# Altium PCB PowerModule.PcbDoc (part 3 of 3)
Units mm, origin at the board's own origin, x right, y up, seen from the top; angles counter-clockwise.
Board outline 200 x 99.95 mm, 2 copper layers (Top Layer 1, Bottom Layer 1); 228 components, 131 nets, 701 pads, 207 vias.
Unrouted connection lines stored in the file: 344.
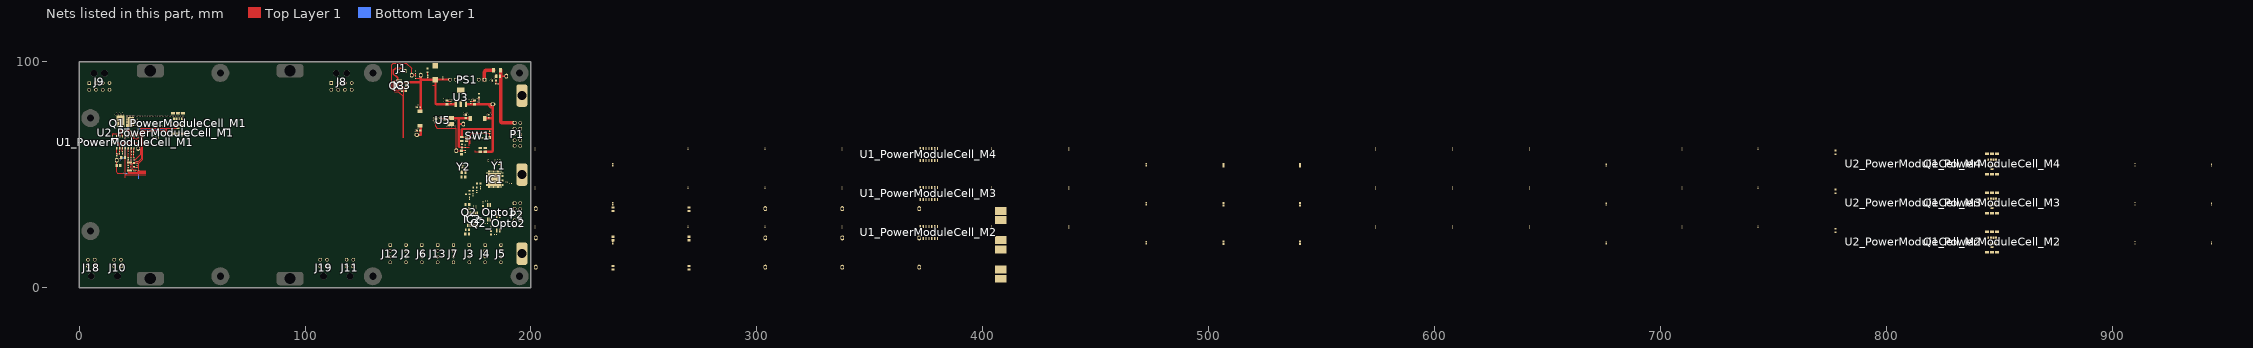
[diagram p2: the nets of this part, all layers, seen from the top]

## Part data (continued)
R1 R17_PowerModuleCell_M1 R17_PowerModuleCell_M2 R17_PowerModuleCell_M3 R17_PowerModuleCell_M4: library part CMP-2002-05875-2, "RES SMD 10K OHM 0.1% 1/16W 0402", Manufacturer=Panasonic, Manufacturer Part Number=ERA-2AEB103X, Package=ERA2A, Power Rating=0.063W, Resistance=10kΩ, Temperature="-55°C to +155°C", Temperature Coefficient=25ppm/°C, Temperature Range High=+155°C, Temperature Range Low=-55°C, Tolerance=0.1%, Voltage Rating=50V, Automotive=Yes, Automotive Grade="Grade 0", Category=Res, ComponentLink2Description=Datasheet, ComponentLink2URL=https://industrial.panasonic.com/cdbs/www-data/pdf/RDM0000/AOA0000C307.pdf, Composition="Metal Film", Device Class L1="Passive Components", Device Class L2=Resistors, Device Class L3="Chip SMD Resistors", Digikey Description="RES SMD 10K OHM 0.1% 1/16W 0402", Footprint Url=https://industrial.panasonic.com/cdbs/www-data/pdf/RDM0000/DMM0000COL17.pdf, Height=0.4mm, Lead Free=Yes, Mouser Description="Thin Film Resistors - SMD 0402 1/16W 10Kohms", Octopart=https://octopart.com/era-2aeb103x-panasonic-9251377, RoHS=TRUE, Series=ERA
R2: library part CMP-2002-00758-4, "RES SMD 2K OHM 1% 1/10W 0402", Case Code (Imperial)=0402, Case Code (Metric)=1005, Max Operating Temperature=155°C, Max Power Dissipation=100mW, Min Operating Temperature=-55°C, Package Quantity=10000, Resistance=2kR, Resistance Tolerance=1%, Resistor Type="Thick Film", Temperature Coefficient=100ppm/°C, Voltage Rating=50V, Case/Package=0402, Construction=Rectangular, Contact Plating=Tin, Depth=0.5mm, Features="Automotive AEC-Q200", Height=0.35mm, Lead Free="Lead Free", Length=1mm, Military Standard=Not, Mount="Surface Mount", Number of Terminations=2, Packaging="Tape and Reel", Power Rating=100mW, Radiation Hardening=No, REACH SVHC="No SVHC", RoHS Compliant=Yes, Series=ERJ, Technology="THICK FILM", Termination=SMD/SMT, Tolerance=1%, Voltage Rating (DC)=50V, Width=0.02inch, Working Voltage=50V
R3 R4 R5 R18_PowerModuleCell_M1 R18_PowerModuleCell_M2 R18_PowerModuleCell_M3 R18_PowerModuleCell_M4: library part CMP-1011-00360-3, "RES SMD 47 OHM 1% 1/10W 0402", Case Code (Imperial)=0402, Case Code (Metric)=1005, Max Operating Temperature=155°C, Max Power Dissipation=100mW, Min Operating Temperature=-55°C, Package Quantity=1, Resistance=47R, Resistance Tolerance=1%, Resistor Type="Thick Film", Temperature Coefficient=100ppm/°C, Voltage Rating=50V, Case/Package=0402, Construction=Rectangular, Contact Plating=Tin, Depth=0.5mm, Features="Automotive AEC-Q200", Height=0.35mm, Lead Free="Lead Free", Length=1mm, Military Standard=Not, Mount="Surface Mount", Number of Pins=2, Number of Terminations=2, Packaging="Tape and Reel", Power Rating=100mW, REACH SVHC="No SVHC", RoHS Compliant=Yes, Series=ERJ, Technology="THICK FILM", Termination=SMD/SMT, Tolerance=1%, Voltage Rating (DC)=50V, Weight=2.8E-05oz, Width=0.02inch
R6: library part CMP-2002-05845-1, Manufacturer=Panasonic, Part Number=ERA-2AED182X
R7: library part CMP-2002-00976-1, Manufacturer=Panasonic, Part Number=ERJ-2RKF5113X
R8 R9 R10 R11: library part CMP-2002-01127-1, Manufacturer=Panasonic, Part Number=ERJ2RKF1800X
R12 R13 R15 R16 R20_PowerModuleCell_M1 R20_PowerModuleCell_M2 R20_PowerModuleCell_M3 R20_PowerModuleCell_M4 R33_Opto1 R33_Opto2: library part CMP-2002-01154-4, "Chip Resistor, 4.7 KOhm, +/- 1%, 0.1 W, -55 to 155 degC, 0402 (1005 Metric), RoHS, Tape and Reel", Case Code (Imperial)=0402, Case Code (Metric)=1005, Max Operating Temperature="155 degC", Min Operating Temperature="-55 degC", Package Quantity=1, PartNumber=ERJ-2RKF4701X, Power Rating="100 mW", Resistance="4.7 KOhm", Tolerance=1%, Voltage Rating="50 V", Case\/Package=0402, ComponentLink1Description="Manufacturer URL", ComponentLink1URL=http://www.panasonic.com/, ComponentLink2Description=Datasheet, ComponentLink2URL=http://industrial.panasonic.com/cdbs/www-data/pdf/RDA0000/AOA0000C86.pdf, DatasheetVersion=04/2015, Height="0.35 mm", Length="1 mm", Mount="Surface Mount", Mounting Technology="Surface Mount", PackageDescription="2-Pin Surface Mount Device, Body 1 x 0.5 mm", PackageReference=0402, Packaging="Cut Tape", Pins=2, Radiation Hardening=No, REACH SVHC=Yes, RoHSCompliant=true, Width="0.5 mm"
R14: library part CMP-2002-00433-1, Manufacturer=Panasonic, Part Number=ERJ-2GEJ103X
R19_PowerModuleCell_M1 R19_PowerModuleCell_M2 R19_PowerModuleCell_M3 R19_PowerModuleCell_M4 R21_PowerModuleCell_M1 R21_PowerModuleCell_M2 R21_PowerModuleCell_M3 R21_PowerModuleCell_M4 R24_PowerModuleCell_M1 R24_PowerModuleCell_M2 R24_PowerModuleCell_M3 R24_PowerModuleCell_M4 R27_PowerModuleCell_M1 R27_PowerModuleCell_M2 R27_PowerModuleCell_M3 R27_PowerModuleCell_M4 R28_PowerModuleCell_M1 R28_PowerModuleCell_M2 R28_PowerModuleCell_M3 R28_PowerModuleCell_M4 R29_PowerModuleCell_M1 R29_PowerModuleCell_M2 R29_PowerModuleCell_M3 R29_PowerModuleCell_M4 R32_PowerModuleCell_M1 R32_PowerModuleCell_M2 R32_PowerModuleCell_M3 R32_PowerModuleCell_M4: library part CMP-1011-00510-4, "Chip Resistor, 1 KOhm, +/- 1%, 100 mW, -55 to 155 degC, 0402 (1005 Metric), RoHS, Tape and Reel", Case Code (Imperial)=0402, Case Code (Metric)=1005, Manufacturer="Basic Passives", Max Operating Temperature="155 degC", Min Operating Temperature="-55 degC", Package Quantity=10000, PartNumber=ERJ-2RKF1001X, Power Rating="100 mW", Resistance="1 KOhm", Tolerance=1%, Voltage Rating="50 V", Case\/Package=0402, ComponentLink1Description="Manufacturer URL", ComponentLink1URL=http://www.panasonic.com/, ComponentLink2Description=Datasheet, ComponentLink2URL=http://industrial.panasonic.com/cdbs/www-data/pdf/RDA0000/AOA0000C86.pdf, DatasheetVersion=04/2015, Height="0.35 mm", Length="1 mm", Mount="Surface Mount", Mounting Technology="Surface Mount", PackageDescription="2-Pin Surface Mount Device, Body 1 x 0.5 mm", PackageReference=0402, Packaging="Tape and Reel", Pins=2, Radiation Hardening=No, REACH SVHC=Yes, RoHSCompliant=true, Width="0.5 mm"
R22_PowerModuleCell_M1 R22_PowerModuleCell_M2 R22_PowerModuleCell_M3 R22_PowerModuleCell_M4: library part WSHP2818R0100FEA, "Resistor", Manufacturer_Name=Vishay, Mouser Part Number=71-WSHP2818R0100FEA, Arrow Part Number=WSHP2818R0100FEA, Arrow Price/Stock=https://www.arrow.com/en/products/wshp2818r0100fea/vishay?region=nac, Datasheet Link=http://www.vishay.com/docs/30347/wshp2818.pdf, Height=1mm, Manufacturer_Part_Number=WSHP2818R0100FEA, Mouser Price/Stock=https://www.mouser.co.uk/ProductDetail/Vishay-Dale/WSHP2818R0100FEA?qs=WY0B%252Bpw29jNppYK03UGNJA%3D%3D
R23_PowerModuleCell_M1 R23_PowerModuleCell_M2 R23_PowerModuleCell_M3 R23_PowerModuleCell_M4 R31_PowerModuleCell_M1 R31_PowerModuleCell_M2 R31_PowerModuleCell_M3 R31_PowerModuleCell_M4: library part CMP-1011-00449-3, "RES SMD 300 OHM 1% 1/10W 0402", Case Code (Imperial)=0402, Case Code (Metric)=1005, Max Operating Temperature=155°C, Max Power Dissipation=100mW, Min Operating Temperature=-55°C, Package Quantity=10000, Resistance=300R, Temperature Coefficient=100ppm/°C, Tolerance=1%, Voltage Rating=50V, Case/Package=0402, Composition="Thick Film", Contact Plating=Tin, Depth=0.5mm, Height=0.35mm, Lead Free="Lead Free", Length=1mm, Military Standard=Not, Mount="Surface Mount", Number of Terminations=2, Packaging="Tape and Reel", Power Rating=100mW, REACH SVHC="No SVHC", Termination=SMD/SMT, Voltage Rating (DC)=50V, Width=0.02inch
R25_PowerModuleCell_M1 R25_PowerModuleCell_M2 R25_PowerModuleCell_M3 R25_PowerModuleCell_M4 R26_PowerModuleCell_M1 R26_PowerModuleCell_M2 R26_PowerModuleCell_M3 R26_PowerModuleCell_M4 R30_PowerModuleCell_M1 R30_PowerModuleCell_M2 R30_PowerModuleCell_M3 R30_PowerModuleCell_M4: library part CMP-2002-00605-3, "Chip Resistor, 100 Ohm, +/- 1%, 100 mW, -55 to 155 degC, 0402 (1005 Metric), RoHS, Tape and Reel", Case Code (Imperial)=0402, Case Code (Metric)=1005, Manufacturer="Basic Passives", Max Operating Temperature="155 degC", Min Operating Temperature="-55 degC", Package Quantity=10000, PartNumber=ERJ-2RKF1000X, Power Rating="100 mW", Resistance="100 Ohm", Tolerance=1%, Voltage Rating="50 V", Case\/Package=0402, ComponentLink1Description="Manufacturer URL", ComponentLink1URL=http://www.panasonic.com/, ComponentLink2Description=Datasheet, ComponentLink2URL=http://industrial.panasonic.com/cdbs/www-data/pdf/RDA0000/AOA0000C86.pdf, DatasheetVersion=04/2015, Height="0.35 mm", Length="1 mm", Mount="Surface Mount", Mounting Technology="Surface Mount", PackageDescription="2-Pin Surface Mount Device, Body 1 x 0.5 mm", PackageReference=0402, Packaging="Tape and Reel", Pins=2, Radiation Hardening=No, REACH SVHC=Yes, RoHSCompliant=true, Width="0.5 mm"
R34_Opto1 R34_Opto2: library part CMP-2002-01170-2, Case Code (Imperial)=0402, Case Code (Metric)=1005, Max Operating Temperature=155°C, Max Power Dissipation=100mW, Min Operating Temperature=-55°C, Resistance=68Ω, Temperature Coefficient=100ppm/°C, Tolerance=1%, Voltage Rating=50V, Case/Package=0402, Composition="Thick Film", Contact Plating=Tin, Depth=500µm, Features="Automotive AEC-Q200", Height=350µm, Lead Free="Lead Free", Length=1mm, Lifecycle Status=Production, Military Standard=Not, Mount="Surface Mount", NexarPartId=55529255, Number of Pins=2, Number of Terminations=2, Packaging="Cut Tape", Power Rating=100mW, REACH SVHC="No SVHC", RoHS=Compliant, Schedule B="8533210045, 8533210045", Termination=SMD/SMT, Voltage Rating (DC)=50V, Weight=793.786648µg, Width=508µm
SW1: library part CMP-10040-000001-2, "SWITCH TACTILE SPST-NO 0.05A 16V", Case/Package=SMD/SMT, Color=Black, Current Rating=50mA, Max Operating Temperature=85°C, Min Operating Temperature=-40°C, Operating Force=160gf, Package Quantity=2900, Voltage Rating (DC)=16V, Actuator Type=Standard, Contact Plating=Silver, Depth=4.6mm, Illumination Type=Non-Illuminated, Lead Free="Lead Free", Length=3.2mm, Max Current Rating=50mA, Mechanical Life=150000Cycles, Mount="Surface Mount", Orientation=Straight, Packaging="Tape and Reel", RoHS Compliant=Yes, Switch Function=Off-Mom, Switch Travel=0.15mm, Termination=J-Bend, Throw Configuration=SPST
U1_PowerModuleCell_M1 U1_PowerModuleCell_M2 U1_PowerModuleCell_M3 U1_PowerModuleCell_M4: library part CMP-1310-00171-1, "Single Supply Quad Operational Amplifier, 3 to 32 V, 0 to 70 degC, 14-Pin SOIC, Pb-Free, Tape and Reel", Manufacturer="On Semiconductor", ComponentLink1Description="Manufacturer URL", ComponentLink1URL=http://www.onsemi.com/, ComponentLink2Description=Datasheet, ComponentLink2URL=http://www.onsemi.cn/pub_link/Collateral/LM324-D.PDF, ComponentLink3Description="Package Specification", ComponentLink3URL=http://www.onsemi.com/pub_link/Collateral/751A-03.PDF, DatasheetVersion="Rev. 25", Mounting Technology="Surface Mount", PackageDescription="14-Pin Small Outline Integrated Circuit, Body 8.65 x 3.9 mm, Pitch 1.27 mm", PackageReference=SOIC-14-751A-03, PackageVersion="Rev. K, 05/2011", Packing="Tape and Reel", PartNumber=LM324DR2G, RoHS=TRUE, VCC Max (V)=32, VCC Min (V)=3
U2_PowerModuleCell_M1 U2_PowerModuleCell_M2 U2_PowerModuleCell_M3 U2_PowerModuleCell_M4: library part CMP-04948-000037-1, "TEMP SENSOR"
U3: library part CMP-0136-00481-1, "500mA Fixed Output CMOS LDO, 3-Pin SOT-223, Extended Temperature, Tape and Reel", DatasheetVersion="revB, 2002", PackageDescription="3-Lead Plastic Small Outline Transistor (DB) [SOT-223]", PackageReference=SOT-223-DB3, PackageVersion="revBB, Aug-2009"
U5: library part CMP-0074-00531-5, "IC VREF SERIES 0.05% SOT23-5", Case/Package=SOT-23, Dropout Voltage=175mV, Max Input Voltage=6V, Max Operating Temperature=125°C, Max Output Current=20mA, Max Output Voltage=2.5V, Max Supply Voltage=2.2V, Min Operating Temperature=-40°C, Nominal Supply Current=60uA, Operating Supply Current=100uA, Package Quantity=1000, Temperature Coefficient=20ppm/°C, Tolerance=0.05%, Height=1.02mm, Lead Free="Lead Free", Length=2.92mm, Min Input Voltage=2.2V, Min Output Voltage=2.5V, Mount="Surface Mount", Number of Channels=1, Number of Pins=5, Output Current=20mA, Output Type=Fixed, Output Voltage=2.5V, Packaging="Tape and Reel", Quiescent Current=100uA, Radiation Hardening=No, REACH SVHC="No SVHC", Reference Type=Series, Reference Voltage=2.5V, Series=-, Supply Current=60uA, Termination=SMD/SMT, Width=1.6mm
Y1: library part CMP-25159-260295-1, "MEMS OSC TCXO 32.7680KHZ LVCMOS", Frequency=32.768kHz, Frequency Stability=5ppm, Max Operating Temperature=70°C, Min Operating Temperature=0°C, Height=0.024inch, Length=0.061inch, Mount="Surface Mount", Packaging="Cut Tape", RoHS Compliant=Yes, Series=SiT1552, Width=0.033inch
Y2: library part CMP-40224-000008-1, "XTAL OSC TCXO 16MHZ 3.3V SMD", Frequency=16MHz, Load Capacitance=15pF, Manufacturer=ECS, Max Supply Current=7mA, Max Supply Voltage=3.63V, Min Supply Voltage=2.97V, Package=TXO-2016, Temperature="-40°C to +85°C", Temperature Range High=+85°C, Temperature Range Low=-40°C, Automotive=No, Category=Crys, ComponentLink2Description=Datasheet, ComponentLink2URL=https://ecsxtal.com/store/pdf/ECS-TXO-2016.pdf, Device Class L1="Passive Components", Device Class L2="Crystals / Oscillators", Device Class L3=Oscillators, Digikey Description="XTAL OSC TCXO 16MHZ 3.3V SMD", Height=0.8mm, Lead Free=Yes, Manufacturer Part Number=ECS-TXO-2016-33-160-TR, Octopart=https://octopart.com/ecs-txo-2016-33-160-tr-ecs+international-102811109, RoHS=TRUE, Series=TXO-2016, Stability=2ppm

## Free pads (board coordinates)
  round 8 hole 3.15: Mech(5,25) Mech(5,75) Mech(62.5,5) Mech(62.5,95) Mech(130,5) Mech(130,95) Mech(195,5) Mech(195,95)
  rrect50% 12x6 hole 5 slot 10 at 0 deg: Mech(31.5,4) Mech(31.5,96) Mech(93.375,4) Mech(93.375,96)

## Via types
v1: diameter 0.61, hole 0.305, Top Layer 1 to Bottom Layer 1, tented both sides, 203 vias
v2: diameter 0.762, hole 0.381, Top Layer 1 to Bottom Layer 1, tented both sides, 2 vias
v3: diameter 0.762, hole 0.381, Top Layer 1 to Bottom Layer 1, 2 vias

## Nets (pads, with @x,y where several pads share a name; then routed paths per layer and width w, separated by ;. In a path a pad name is that pad's centre, name@x,y a point inside that pad or via, vN(x,y) a via of type N, cw(c..) or ccw(c..) an arc to the next point about the centre after c; other vN are vias at no path point)
2V5: C14.2 C15.2 C43.2 IC1.20 J22.1 U5.5 | length 27.3
  Top Layer 1 w0.254: J22.1@166.835,60.579 J22.1@167.005,60.579 ; C14.2@168.624,60.579 C14.2@169.232,60.559 cw(c169.411,60.559) 169.234,60.579 cw(c169.411,60.559) C14.2@169.411,60.738
  Top Layer 1 w0.45: C14.2@169.411,60.738 C15.2@170.96,60.738
  Top Layer 1 w0.5: C43.2@157.959,73.084 157.959,71.403 ccw(c158.881,71.407) 158.876,70.485 ; C43.2@158.023,73.116 C43.2@158.311,73.116 ; C43.2@158.517,73.091 159.954,73.091 U5.5@160.29,73.091 ; 158.877,70.485 166.497,70.485 cw(c166.497,69.977) 167.005,69.977 167.005,60.749 cw(c166.835,60.749) J22.1@166.835,60.579 ; J22.1@167.005,60.579 C14.2@168.624,60.579
3V3_F: C4.1 C6.2 C7.2 C42.1 IC1.21 J27.1 L2.1 U5.3 U5.4 Y1.3 | length 32.8
  Top Layer 1 w0.254: U5.3@162.391,74.985 U5.3@162.391,74.991 ; 168.021,72.517 ccw(c168.148,72.517) 168.148,72.39 ; C7.2@170.985,62.095 172.682,62.095 172.682,62.084
  Top Layer 1 w0.45: C6.2@169.564,62.095 C7.2@170.985,62.095
  Top Layer 1 w0.5: U5.4@159.831,74.991 U5.3@161.932,74.991 U5.3@162.391,74.991 ; U5.3@162.391,74.985 C42.1@164.557,74.985
  Top Layer 1 w0.762: 167.973,62.545 ccw(c168.46,62.545) 168.46,62.059 168.461,62.059 C6.2@169.532,62.063
  Top Layer 1 w1: C42.1@164.541,75.044 ccw(c164.654,75.044) 164.557,74.985 ccw(c164.654,75.044) 164.654,74.93 168.021,74.93 ; 168.021,62.593 168.021,72.517 168.021,74.93 ; 168.148,72.39 J27.1@170.096,72.39 ; L2.1@173.127,74.93 168.021,74.93
20V_F: C2.1 C18_PowerModuleCell_M1.2 C18_PowerModuleCell_M2.2 C18_PowerModuleCell_M3.2 C18_PowerModuleCell_M4.2 J25.1 L1.1 U1_PowerModuleCell_M1.4 U1_PowerModuleCell_M2.4 U1_PowerModuleCell_M3.4 U1_PowerModuleCell_M4.4 | length 27.9
  Top Layer 1 w0.45: C18_PowerModuleCell_M1.2@20.454,57.562 U1_PowerModuleCell_M1.4@20.454,61.601
  Top Layer 1 w0.508: 20.485,48.641 20.485,50.228 ; C18_PowerModuleCell_M1.2@20.485,57.531 20.485,50.228 ; 29.464,49.911 20.803,49.911 cw(c20.803,50.228) 20.485,50.228
  Top Layer 1 w0.762: J25.1@149.479,67.564 151.257,67.564
  Top Layer 1 w1.016: 151.251,67.558 151.257,67.564 L1.1@151.257,71.586
ALERT-MISO: D4.1 IC1.29 R34_Opto2.1
ALERT-MOSI: D3.1 IC1.25 Q2_Opto1.4 R33_Opto1.2
Alert_M1: D10_PowerModuleCell_M1.1 IC1.19 R20_PowerModuleCell_M1.1 U2_PowerModuleCell_M1.C2 | length 37.9
  Top Layer 1 w0.254: 29.464,51.435 25.908,51.435 25.146,52.197 24.003,52.197 23.541,52.659 23.541,54.982 23.652,55.094 D10_PowerModuleCell_M1.1@24.266,55.094 24.741,55.094 ccw(c24.741,55.372) 25.019,55.372 cw(c25.385,55.372) 25.385,55.738 R20_PowerModuleCell_M1.1@25.654,55.738 26.068,55.738 ccw(c26.068,55.929) 26.203,55.794 27.758,57.349 ccw(c27.622,57.483) 27.813,57.483 27.813,68.453 cw(c29.083,68.453) 29.083,69.723 37.972,69.723 ccw(c37.971,69.913) 38.061,69.746 cw(c38.328,69.255) 38.606,69.739 38.648,69.715 cw(c38.553,69.55) 38.688,69.684 38.722,69.651 cw(c38.328,69.255) 38.724,69.649 38.725,69.648 38.886,69.486 38.886,69.023 38.735,68.872 U2_PowerModuleCell_M1.C2@38.735,68.707
Alert_M2: D10_PowerModuleCell_M2.1 IC1.13 R20_PowerModuleCell_M2.1 U2_PowerModuleCell_M2.C2
Alert_M3: D10_PowerModuleCell_M3.1 IC1.17 R20_PowerModuleCell_M3.1 U2_PowerModuleCell_M3.C2
Alert_M4: D10_PowerModuleCell_M4.1 IC1.14 R20_PowerModuleCell_M4.1 U2_PowerModuleCell_M4.C2
cFan-PWM: IC1.15 IC3.C2 | length 23
  Top Layer 1 w0.254: IC3.C2@143.256,89.2 143.764,88.692 143.764,66.406
CurrentSignal_M1: C19_PowerModuleCell_M1.2 IC1.9 J33_PowerModuleCell_M1.1 R27_PowerModuleCell_M1.2 | length 18.4
  Top Layer 1 w0.254: J33_PowerModuleCell_M1.1@16.644,56.383 16.644,50.952 16.923,50.673 v1(19.799,50.673) ; v1(21.336,50.673) 29.464,50.673
  Bottom Layer 1 w0.254: v1(19.799,50.673) v1(21.336,50.673)
CurrentSignal_M2: C19_PowerModuleCell_M2.2 IC1.10 J33_PowerModuleCell_M2.1 R27_PowerModuleCell_M2.2
CurrentSignal_M3: C19_PowerModuleCell_M3.2 IC1.8 J33_PowerModuleCell_M3.1 R27_PowerModuleCell_M3.2
CurrentSignal_M4: C19_PowerModuleCell_M4.2 IC1.11 J33_PowerModuleCell_M4.1 R27_PowerModuleCell_M4.2
Gate: IC3.A1 Q3.2 Q3.5 | length 4.2
  Top Layer 1 w0.254: Q3.5@140.923,90.244 140.946,90.267 140.946,90.511 141.168,90.733 142.123,90.733 IC3.A1@142.856,90
  Bottom Layer 1 w0.254: v1(140.923,88.574) 140.93,88.581 v1(140.93,90.227)
Gate_PowerModuleCell_M1: J32_PowerModuleCell_M1.1 Q1_PowerModuleCell_M1.12 R21_PowerModuleCell_M1.2 | length 32.6
  Top Layer 1 w0.45: R21_PowerModuleCell_M1.2@24.264,56.573 24.891,56.573 27.266,58.948 27.266,61.489 ; J32_PowerModuleCell_M1.1@26.407,61.489 27.266,61.489 ; 27.204,70.02 27.266,61.489 ; 27.204,70.147 cw(c27.492,70.148) 27.492,70.437 43.3,70.437 Q1_PowerModuleCell_M1.12@43.725,70.437
Gate_PowerModuleCell_M2: J32_PowerModuleCell_M2.1 Q1_PowerModuleCell_M2.12 R21_PowerModuleCell_M2.2
Gate_PowerModuleCell_M3: J32_PowerModuleCell_M3.1 Q1_PowerModuleCell_M3.12 R21_PowerModuleCell_M3.2
Gate_PowerModuleCell_M4: J32_PowerModuleCell_M4.1 Q1_PowerModuleCell_M4.12 R21_PowerModuleCell_M4.2
GND_1: C22.1 C29.1 C30.1 C31.1 C32.1 D1.1 IC2.2 IC2.8 IC2.15 J3.1 J7.1 J28.1 P1.2 P2.2 PS1.2 Q2_Opto1.2 Q2_Opto2.3
  other v1: 182.891,90.862 182.012,91.696 182.891,92.53 183.726,92.636 183.725,93.536 184.622,94.705
GND_2: C1.2 C2.2 C3.2 C4.2 C5.1 C6.1 C7.1 C8.1 C9.1 C10.1 C11.1 C12.1 C13.1 C14.1 C15.1 C17_PowerModuleCell_M1.2 C17_PowerModuleCell_M2.2 C17_PowerModuleCell_M3.2 C17_PowerModuleCell_M4.2 C18_PowerModuleCell_M1.1 C18_PowerModuleCell_M2.1 C18_PowerModuleCell_M3.1 C18_PowerModuleCell_M4.1 C19_PowerModuleCell_M1.1 C19_PowerModuleCell_M2.1 C19_PowerModuleCell_M3.1 C19_PowerModuleCell_M4.1 C20_PowerModuleCell_M1.1 C20_PowerModuleCell_M2.1 C20_PowerModuleCell_M3.1 C20_PowerModuleCell_M4.1 C21_PowerModuleCell_M1.1 C21_PowerModuleCell_M2.1 C21_PowerModuleCell_M3.1 C21_PowerModuleCell_M4.1 C23.2 C24.1 C25.1 C26.1 C27.1 C28.1 C42.2 C43.1 C44.1 C45.1 D2.1 D5.1 D6.1 D7.1 D8.1 D9.1 D11.2 IC1.49 IC2.9 IC3.B2 J1.2 J2.1 J4.1 J5.1 J6.1 J10.1 J10.2 J10.3 J10.4 J11.1 J11.2 J11.3 J11.4 J12.1 J13.1 J18.1 J18.2 J18.3 J18.4 J19.1 J19.2 J19.3 J19.4 J30.1 J31.1 PS1.6 Q2_Opto1.3 Q2_Opto2.2 R2.1 R19_PowerModuleCell_M1.1 R19_PowerModuleCell_M2.1 R19_PowerModuleCell_M3.1 R19_PowerModuleCell_M4.1 R22_PowerModuleCell_M1.2 R22_PowerModuleCell_M2.2 R22_PowerModuleCell_M3.2 R22_PowerModuleCell_M4.2 R32_PowerModuleCell_M1.2 R32_PowerModuleCell_M2.2 R32_PowerModuleCell_M3.2 R32_PowerModuleCell_M4.2 SW1.1 SW1.2 U1_PowerModuleCell_M1.11 U1_PowerModuleCell_M1.12 U1_PowerModuleCell_M2.11 U1_PowerModuleCell_M2.12 U1_PowerModuleCell_M3.11 U1_PowerModuleCell_M3.12 U1_PowerModuleCell_M4.11 U1_PowerModuleCell_M4.12 U2_PowerModuleCell_M1.B2 U2_PowerModuleCell_M1.C1 U2_PowerModuleCell_M2.B2 U2_PowerModuleCell_M3.B2 U2_PowerModuleCell_M4.B2 U3.2 U3.4 U5.2 Y1.1 Y1.4 Y2.2 | length 47
  Top Layer 1 w0.254: v3(17.197,73.569) R22_PowerModuleCell_M1.2@18.362,73.569 ; v1(17.754,57.538) 18.312,57.538 C18_PowerModuleCell_M1.1@18.686,57.532 ; C18_PowerModuleCell_M1.1@18.707,57.432 18.727,57.06 cw(c18.536,57.05) 18.727,57.052 v1(18.733,56.374) ; C18_PowerModuleCell_M1.1@18.707,57.65 C18_PowerModuleCell_M1.1@18.733,58.149 ; R32_PowerModuleCell_M1.2@19.036,59.225 R32_PowerModuleCell_M1.2@19.184,59.214 R32_PowerModuleCell_M1.2@19.332,59.225 ; C20_PowerModuleCell_M1.1@22.821,51.835 C21_PowerModuleCell_M1.1@22.821,55.293 22.994,55.466 R19_PowerModuleCell_M1.1@22.994,56.573 ; C2.2@149.573,69.452 C2.2@149.86,69.165 ; C26.1@162.814,82.8 163.139,82.475 C25.1@164.592,82.475 ; C28.1@173.329,82.475 174.706,82.475 C27.1@175.031,82.8 ; C10.1@179.675,61.79 C10.1@179.705,61.76 ; 185.928,54.483 186.338,54.483
  Top Layer 1 w0.5: U1_PowerModuleCell_M1.12@19.184,66.921 v2(19.184,68.459) ; v1(20.446,65.799) U1_PowerModuleCell_M1.11@20.446,66.892
  Bottom Layer 1 w0.254: v1(18.733,56.374) 18.733,57.538 ; v1(26.035,70.358) 38.148,70.358 cw(c38.148,70.168) 38.282,70.303 38.328,70.257 38.328,69.255
  Bottom Layer 1 w0.5: v3(17.197,73.569) 19.093,71.673 cw(c18.871,71.452) 19.184,71.452 v2(19.184,68.459) ; v1(17.754,57.538) 18.733,57.538 19.943,57.538 ccw(c19.943,57.852) 20.256,57.852 ; 20.446,57.842 20.446,64.793 ; 20.454,64.793 20.454,65.374 ; 20.454,65.42 v1@20.454,65.799
  other v1: 22.837,52.802 22.807,54.291 148.717,69.088 148.717,69.85 149.86,70.231 162.687,71.12 163.83,71.12 164.973,71.12 166.497,71.501 162.687,72.263 166.497,72.644 156.718,73.787 166.497,73.787 160.172,74.041 160.909,74.041 156.718,74.803 156.845,75.692 157.988,75.692 159.131,75.692 170.289,76.5 172,76.5 180.522,76.5 182.147,76.5 16.002,76.581 17.272,76.581 18.542,76.581 19.812,76.581 16.637,77.089 17.907,77.089 19.177,77.089 170.555,77.394 171.68,77.394 180.787,77.394 181.913,77.394 148.946,79.529 148.946,80.291 149.987,80.645 161.647,82.261 176.171,82.267 163.973,83.104 165.067,83.104 172.751,83.11 173.845,83.11 161.671,83.693 176.149,83.693 163.48,83.711 174.338,83.717
HSE: IC1.5
I2C1_SCL: IC1.46 IC2.13 J4.2 R9.1 R13.1
I2C1_SDA: IC1.47 IC2.11 J4.4 R8.1 R12.1
I2C2_SCL: IC1.16 J5.2 R16.1 U2_PowerModuleCell_M1.A2 U2_PowerModuleCell_M2.A2 U2_PowerModuleCell_M3.A2 U2_PowerModuleCell_M4.A2 U2_PowerModuleCell_M4.C1
I2C2_SDA: IC1.30 J5.4 R15.1 U2_PowerModuleCell_M1.A1 U2_PowerModuleCell_M2.A1 U2_PowerModuleCell_M3.A1 U2_PowerModuleCell_M3.C1 U2_PowerModuleCell_M4.A1
ISO_12V: C22.2 J23.1 L3.1 P1.1 P2.1 R7.2 | length 32.9
  Top Layer 1 w0.254: R7.2@185.412,90.17 186.605,90.17
  Top Layer 1 w0.762: C22.2@186.605,93.599 J23.1@188.849,93.599
  Top Layer 1 w1.524: L3.1@186.605,96.52 186.605,93.599 186.605,90.17 186.605,73.702 ccw(c187.432,73.702) 187.432,72.875 P1.1@192.742,72.875
ISO_ALERT-MISO: P1.4 P2.4 Q2_Opto2.4 R33_Opto2.2
ISO_ALERT-MOSI: P1.6 P2.6 R34_Opto1.1
ISO_I2C_SCL: IC2.4 J3.2 P1.3 P2.3
ISO_I2C_SDA: IC2.6 J3.4 P1.5 P2.5
ISO_USART_RX: IC2.5 J7.2 P1.8 P2.8
ISO_USART_TX: IC2.3 J7.4 P1.10 P2.10
Load: J8.1 J8.2 J8.3 J8.4 J8.5 J8.6 J8.7 J8.8 J9.1 J9.2 J9.3 J9.4 J9.5 J9.6 J9.7 J9.8 Q1_PowerModuleCell_M1.1 Q1_PowerModuleCell_M1.2 Q1_PowerModuleCell_M1.3 Q1_PowerModuleCell_M1.13 Q1_PowerModuleCell_M1.14 Q1_PowerModuleCell_M1.15 Q1_PowerModuleCell_M2.1 Q1_PowerModuleCell_M2.2 Q1_PowerModuleCell_M2.3 Q1_PowerModuleCell_M2.13 Q1_PowerModuleCell_M2.14 Q1_PowerModuleCell_M2.15 Q1_PowerModuleCell_M3.1 Q1_PowerModuleCell_M3.2 Q1_PowerModuleCell_M3.3 Q1_PowerModuleCell_M3.13 Q1_PowerModuleCell_M3.14 Q1_PowerModuleCell_M3.15 Q1_PowerModuleCell_M4.1 Q1_PowerModuleCell_M4.2 Q1_PowerModuleCell_M4.3 Q1_PowerModuleCell_M4.13 Q1_PowerModuleCell_M4.14 Q1_PowerModuleCell_M4.15
  other v1: 42.709,68.187 44.741,68.187 42.709,77.187 44.741,77.187
LSE_RTC: IC1.3 Y1.2
NetC16_PowerModuleCell_M1_1: C16_PowerModuleCell_M1.1 R17_PowerModuleCell_M1.2 R19_PowerModuleCell_M1.2 U1_PowerModuleCell_M1.6 | length 5.2
  Top Layer 1 w0.254: C16_PowerModuleCell_M1.1@22.987,58.811 22.987,58.85 C16_PowerModuleCell_M1.1@22.987,59.04 ; U1_PowerModuleCell_M1.6@22.994,61.601 R17_PowerModuleCell_M1.2@22.994,60.303 ; R19_PowerModuleCell_M1.2@23.001,57.48 23.001,58.785 23.243,58.85 23.118,58.825 23.113,58.811 C16_PowerModuleCell_M1.1@23.087,58.811 ; C16_PowerModuleCell_M1.1@23.022,58.93 cw(c23.177,59.04) C16_PowerModuleCell_M1.1@22.987,59.04 ; C16_PowerModuleCell_M1.1@22.987,59.04 22.987,59.85 cw(c23.177,59.85) R17_PowerModuleCell_M1.2@23.043,59.985 ; R17_PowerModuleCell_M1.2@22.994,60.303 ccw(c23.185,60.304) 22.997,60.272 23.024,60.262 23.172,60.114 R17_PowerModuleCell_M1.2@23.043,59.985 ; R17_PowerModuleCell_M1.2@22.994,60.303 22.994,59.936 R17_PowerModuleCell_M1.2@23.043,59.985
NetC16_PowerModuleCell_M1_2: C16_PowerModuleCell_M1.2 R17_PowerModuleCell_M1.1 R21_PowerModuleCell_M1.1 U1_PowerModuleCell_M1.7 | length 4.9
  Top Layer 1 w0.254: C16_PowerModuleCell_M1.2@24.001,58.85 24.201,58.85 ccw(c24.066,58.985) 24.257,58.985 24.257,59.458 24.257,59.85 ccw(c24.066,59.85) R17_PowerModuleCell_M1.1@24.201,59.985 ; C16_PowerModuleCell_M1.2@24.202,58.85 cw(c24.072,58.71) 24.263,58.71 R21_PowerModuleCell_M1.1@24.263,57.474 ; U1_PowerModuleCell_M1.7@24.247,61.584 R17_PowerModuleCell_M1.1@24.247,60.303 ; R17_PowerModuleCell_M1.1@24.201,59.985 24.247,59.939 R17_PowerModuleCell_M1.1@24.247,60.303 ; R17_PowerModuleCell_M1.1@24.201,59.985 24.072,60.114 24.22,60.262 24.245,60.275 ccw(c24.056,60.304) R17_PowerModuleCell_M1.1@24.247,60.303
NetC16_PowerModuleCell_M2_1: C16_PowerModuleCell_M2.1 R17_PowerModuleCell_M2.2 R19_PowerModuleCell_M2.2 U1_PowerModuleCell_M2.6
NetC16_PowerModuleCell_M2_2: C16_PowerModuleCell_M2.2 R17_PowerModuleCell_M2.1 R21_PowerModuleCell_M2.1 U1_PowerModuleCell_M2.7
NetC16_PowerModuleCell_M3_1: C16_PowerModuleCell_M3.1 R17_PowerModuleCell_M3.2 R19_PowerModuleCell_M3.2 U1_PowerModuleCell_M3.6
NetC16_PowerModuleCell_M3_2: C16_PowerModuleCell_M3.2 R17_PowerModuleCell_M3.1 R21_PowerModuleCell_M3.1 U1_PowerModuleCell_M3.7
NetC16_PowerModuleCell_M4_1: C16_PowerModuleCell_M4.1 R17_PowerModuleCell_M4.2 R19_PowerModuleCell_M4.2 U1_PowerModuleCell_M4.6
NetC16_PowerModuleCell_M4_2: C16_PowerModuleCell_M4.2 R17_PowerModuleCell_M4.1 R21_PowerModuleCell_M4.1 U1_PowerModuleCell_M4.7
NetC21_PowerModuleCell_M1_2: C21_PowerModuleCell_M1.2 R28_PowerModuleCell_M1.1 R29_PowerModuleCell_M1.2 | length 2.6
  Top Layer 1 w0.254: R28_PowerModuleCell_M1.1@21.717,54.014 21.717,55.352 C21_PowerModuleCell_M1.2@21.721,55.356 ; C21_PowerModuleCell_M1.2@21.717,55.356 R29_PowerModuleCell_M1.2@21.717,56.572
NetC21_PowerModuleCell_M2_2: C21_PowerModuleCell_M2.2 R28_PowerModuleCell_M2.1 R29_PowerModuleCell_M2.2
NetC21_PowerModuleCell_M3_2: C21_PowerModuleCell_M3.2 R28_PowerModuleCell_M3.1 R29_PowerModuleCell_M3.2
NetC21_PowerModuleCell_M4_2: C21_PowerModuleCell_M4.2 R28_PowerModuleCell_M4.1 R29_PowerModuleCell_M4.2
NetD1_2: D1.2 R7.1 | length 1.6
  Top Layer 1 w0.254: R7.1@184.412,90.17 184.475,90.233 ccw(c184.34,90.368) 184.531,90.368 D1.2@184.531,91.694
NetD2_2: D2.2 R3.1 | length 1.2
  Top Layer 1 w0.254: R3.1@177.038,82.988 D2.2@177.038,84.201
NetD3_2: D3.2 R4.1
NetD4_2: D4.2 R5.1
NetD5_2: D5.2 R6.1 | length 1.4
  Top Layer 1 w0.254: R6.1@154.25,93.897 D5.2@154.25,95.339
NetD6_2: D6.2 R8.2
NetD7_2: D7.2 R9.2
NetD8_2: D8.2 R10.2
NetD9_2: D9.2 R11.2
NetD10_PowerModuleCell_M1_2: D10_PowerModuleCell_M1.2 R18_PowerModuleCell_M1.1 | length 1.6
  Top Layer 1 w0.254: D10_PowerModuleCell_M1.2@24.266,53.494 D10_PowerModuleCell_M1.2@24.491,53.269 ; D10_PowerModuleCell_M1.2@24.492,53.268 ccw(c24.626,53.404) 24.626,53.213 R18_PowerModuleCell_M1.1@25.736,53.213
NetD10_PowerModuleCell_M2_2: D10_PowerModuleCell_M2.2 R18_PowerModuleCell_M2.1
NetD10_PowerModuleCell_M3_2: D10_PowerModuleCell_M3.2 R18_PowerModuleCell_M3.1
NetD10_PowerModuleCell_M4_2: D10_PowerModuleCell_M4.2 R18_PowerModuleCell_M4.1
NetJ35_PowerModuleCell_M1_1: J35_PowerModuleCell_M1.1 R29_PowerModuleCell_M1.1 U1_PowerModuleCell_M1.5 | length 3.7
  Top Layer 1 w0.254: R29_PowerModuleCell_M1.1@21.717,57.472 21.743,57.498 21.743,59.638 J35_PowerModuleCell_M1.1@21.769,59.664
  Top Layer 1 w0.45: J35_PowerModuleCell_M1.1@21.724,60.143 U1_PowerModuleCell_M1.5@21.724,61.601
NetJ35_PowerModuleCell_M2_1: J35_PowerModuleCell_M2.1 R29_PowerModuleCell_M2.1 U1_PowerModuleCell_M2.5
NetJ35_PowerModuleCell_M3_1: J35_PowerModuleCell_M3.1 R29_PowerModuleCell_M3.1 U1_PowerModuleCell_M3.5
NetJ35_PowerModuleCell_M4_1: J35_PowerModuleCell_M4.1 R29_PowerModuleCell_M4.1 U1_PowerModuleCell_M4.5
NetL3_2: L3.2 PS1.1 | length 7.8
  Top Layer 1 w1.524: PS1.1@179.425,92.075 179.425,95.359 cw(c180.251,95.359) 180.251,96.184 L3.2@183.475,96.184
NetQ2_Opto1_1: Q2_Opto1.1 R34_Opto1.2
NetQ2_Opto2_1: Q2_Opto2.1 R34_Opto2.2
NetR23_PowerModuleCell_M1_1: R23_PowerModuleCell_M1.1 R24_PowerModuleCell_M1.1 U1_PowerModuleCell_M1.2 | length 6.8
  Top Layer 1 w0.5: R23_PowerModuleCell_M1.1@14.769,64.097 17.009,64.097 cw(c17.009,63.162) 17.944,63.162 17.944,61.941 U1_PowerModuleCell_M1.2@17.914,61.601 R24_PowerModuleCell_M1.1@17.914,60.114
NetR23_PowerModuleCell_M1_2: R23_PowerModuleCell_M1.2 R25_PowerModuleCell_M1.2 U1_PowerModuleCell_M1.14 | length 4.2
  Top Layer 1 w0.5: R23_PowerModuleCell_M1.2@14.769,65.101 14.769,65.733 ; R25_PowerModuleCell_M1.2@14.769,66.364 14.769,65.733 ; U1_PowerModuleCell_M1.14@16.644,66.921 16.644,65.924 16.453,65.733 14.769,65.733
NetR23_PowerModuleCell_M2_1: R23_PowerModuleCell_M2.1 R24_PowerModuleCell_M2.1 U1_PowerModuleCell_M2.2
NetR23_PowerModuleCell_M2_2: R23_PowerModuleCell_M2.2 R25_PowerModuleCell_M2.2 U1_PowerModuleCell_M2.14
NetR23_PowerModuleCell_M3_1: R23_PowerModuleCell_M3.1 R24_PowerModuleCell_M3.1 U1_PowerModuleCell_M3.2
NetR23_PowerModuleCell_M3_2: R23_PowerModuleCell_M3.2 R25_PowerModuleCell_M3.2 U1_PowerModuleCell_M3.14
NetR23_PowerModuleCell_M4_1: R23_PowerModuleCell_M4.1 R24_PowerModuleCell_M4.1 U1_PowerModuleCell_M4.2
NetR23_PowerModuleCell_M4_2: R23_PowerModuleCell_M4.2 R25_PowerModuleCell_M4.2 U1_PowerModuleCell_M4.14
NetR24_PowerModuleCell_M1_2: R24_PowerModuleCell_M1.2 R27_PowerModuleCell_M1.1 U1_PowerModuleCell_M1.1 | length 3.7
  Top Layer 1 w0.254: R27_PowerModuleCell_M1.1@16.644,59.164 R27_PowerModuleCell_M1.1@16.694,59.214
  Top Layer 1 w0.45: R27_PowerModuleCell_M1.1@16.644,59.214 U1_PowerModuleCell_M1.1@16.644,61.601 ; R27_PowerModuleCell_M1.1@16.694,59.214 R24_PowerModuleCell_M1.2@17.914,59.214
NetR24_PowerModuleCell_M2_2: R24_PowerModuleCell_M2.2 R27_PowerModuleCell_M2.1 U1_PowerModuleCell_M2.1
NetR24_PowerModuleCell_M3_2: R24_PowerModuleCell_M3.2 R27_PowerModuleCell_M3.1 U1_PowerModuleCell_M3.1
NetR24_PowerModuleCell_M4_2: R24_PowerModuleCell_M4.2 R27_PowerModuleCell_M4.1 U1_PowerModuleCell_M4.1
NetR25_PowerModuleCell_M1_1: R25_PowerModuleCell_M1.1 R26_PowerModuleCell_M1.2 U1_PowerModuleCell_M1.13 | length 8.3
  Top Layer 1 w0.5: R25_PowerModuleCell_M1.1@14.769,67.164 14.769,67.855 cw(c15.083,67.855) 15.083,68.169 17.914,68.169 ; U1_PowerModuleCell_M1.13@17.914,66.921 17.914,67.88 17.914,68.169 ; 18.902,69.634 ccw(c18.904,69.32) 18.683,69.543 18.005,68.865 ccw(c18.228,68.644) 17.914,68.646 17.914,68.169 ; 18.904,69.634 R26_PowerModuleCell_M1.2@20.054,69.634
NetR25_PowerModuleCell_M2_1: R25_PowerModuleCell_M2.1 R26_PowerModuleCell_M2.2 U1_PowerModuleCell_M2.13
NetR25_PowerModuleCell_M3_1: R25_PowerModuleCell_M3.1 R26_PowerModuleCell_M3.2 U1_PowerModuleCell_M3.13
NetR25_PowerModuleCell_M4_1: R25_PowerModuleCell_M4.1 R26_PowerModuleCell_M4.2 U1_PowerModuleCell_M4.13
NetR26_PowerModuleCell_M1_1: R26_PowerModuleCell_M1.1 R30_PowerModuleCell_M1.2 U1_PowerModuleCell_M1.9 | length 8.4
  Top Layer 1 w0.5: R26_PowerModuleCell_M1.1@20.854,69.634 22.1,69.634 cw(c22.1,69.32) 22.321,69.543 22.994,68.87 U1_PowerModuleCell_M1.9@22.994,66.921 ; 22.994,67.789 cw(c23.283,67.789) 23.283,68.078 25.784,68.078 cw(c25.784,67.789) 26.072,67.789 R30_PowerModuleCell_M1.2@26.072,67.164
NetR26_PowerModuleCell_M2_1: R26_PowerModuleCell_M2.1 R30_PowerModuleCell_M2.2 U1_PowerModuleCell_M2.9
NetR26_PowerModuleCell_M3_1: R26_PowerModuleCell_M3.1 R30_PowerModuleCell_M3.2 U1_PowerModuleCell_M3.9
NetR26_PowerModuleCell_M4_1: R26_PowerModuleCell_M4.1 R30_PowerModuleCell_M4.2 U1_PowerModuleCell_M4.9
NetR30_PowerModuleCell_M1_1: R30_PowerModuleCell_M1.1 R31_PowerModuleCell_M1.2 U1_PowerModuleCell_M1.8 | length 4.1
  Top Layer 1 w0.5: U1_PowerModuleCell_M1.8@24.264,66.921 24.264,65.984 24.461,65.787 26.072,65.787 ; R30_PowerModuleCell_M1.1@26.072,66.364 26.072,65.787 ; R31_PowerModuleCell_M1.2@26.104,65.101 26.072,65.21 26.072,65.787
NetR30_PowerModuleCell_M2_1: R30_PowerModuleCell_M2.1 R31_PowerModuleCell_M2.2 U1_PowerModuleCell_M2.8
NetR30_PowerModuleCell_M3_1: R30_PowerModuleCell_M3.1 R31_PowerModuleCell_M3.2 U1_PowerModuleCell_M3.8
NetR30_PowerModuleCell_M4_1: R30_PowerModuleCell_M4.1 R31_PowerModuleCell_M4.2 U1_PowerModuleCell_M4.8
NetR31_PowerModuleCell_M1_1: R31_PowerModuleCell_M1.1 R32_PowerModuleCell_M1.1 U1_PowerModuleCell_M1.3 | length 10.5
  Top Layer 1 w0.45: R32_PowerModuleCell_M1.1@19.184,60.146 19.184,61.966 19.184,63.427 ; 19.184,63.429 cw(c19.473,63.427) 19.193,63.499 cw(c19.965,63.299) 19.962,64.097 ; 19.963,64.097 R31_PowerModuleCell_M1.1@26.104,64.097
NetR31_PowerModuleCell_M2_1: R31_PowerModuleCell_M2.1 R32_PowerModuleCell_M2.1 U1_PowerModuleCell_M2.3
NetR31_PowerModuleCell_M3_1: R31_PowerModuleCell_M3.1 R32_PowerModuleCell_M3.1 U1_PowerModuleCell_M3.3
NetR31_PowerModuleCell_M4_1: R31_PowerModuleCell_M4.1 R32_PowerModuleCell_M4.1 U1_PowerModuleCell_M4.3
NRST: C5.2 IC1.7 R14.2 SW1.3 SW1.4 | length 14.7
  Top Layer 1 w0.254: 173.101,63.627 173.101,67.185 cw(c174.289,67.185) SW1.4@174.289,68.373 SW1.3@178.439,68.373 180.094,68.373 cw(c180.096,67.992) 180.365,68.262 ccw(c180.498,68.397) 180.497,68.207 R14.2@181.737,68.207 ; C5.2@181.703,66.455 ccw(c181.703,66.488) 181.737,66.488 R14.2@181.737,68.199
PA4: IC1.12 J21.1
PC10: IC1.39 J17.1
PC11: IC1.40 J14.1
PC13: IC1.2 J16.1
PC15: IC1.4 J20.1
PF1: IC1.6 J15.1
ProcessedParam_M1: C20_PowerModuleCell_M1.2 IC1.42 J34_PowerModuleCell_M1.1 R28_PowerModuleCell_M1.2 | length 10.3
  Top Layer 1 w0.254: R28_PowerModuleCell_M1.2@21.717,53.114 21.717,51.858 C20_PowerModuleCell_M1.2@21.74,51.835 21.74,51.304 ccw(c21.99,51.304) 21.99,51.054 24.511,51.054 ; J34_PowerModuleCell_M1.1@24.511,51.689 24.511,51.054 ; 29.464,51.054 24.511,51.054
ProcessedParam_M2: C20_PowerModuleCell_M3.2 IC1.31 J34_PowerModuleCell_M3.1 R28_PowerModuleCell_M3.2
ProcessedParam_M3: C20_PowerModuleCell_M2.2 IC1.24 J34_PowerModuleCell_M2.1 R28_PowerModuleCell_M2.2
ProcessedParam_M4: C20_PowerModuleCell_M4.2 IC1.22 J34_PowerModuleCell_M4.1 R28_PowerModuleCell_M4.2
RefParam_M1: IC1.43
RefParam_M2: IC1.32
RefParam_M3: IC1.44
RefParam_M4: IC1.18
Shunt_H_PowerModuleCell_M1: Q1_PowerModuleCell_M1.4 Q1_PowerModuleCell_M1.5 Q1_PowerModuleCell_M1.6 Q1_PowerModuleCell_M1.7 Q1_PowerModuleCell_M1.8 Q1_PowerModuleCell_M1.9 Q1_PowerModuleCell_M1.10 Q1_PowerModuleCell_M1.11 R22_PowerModuleCell_M1.1 U1_PowerModuleCell_M1.10 | length 8.7
  Top Layer 1 w0.254: R22_PowerModuleCell_M1.1@22.473,73.569 R22_PowerModuleCell_M1.1@23.638,73.569
  Top Layer 1 w0.5: U1_PowerModuleCell_M1.10@21.724,66.921 v2(21.724,68.459)
  Bottom Layer 1 w0.5: v2@21.689,68.459 cw(c22.002,68.462) 21.688,68.461 21.688,71.701 23.253,73.266 ccw(c22.987,73.533) 23.331,73.378 cw(c23.616,73.248) 23.616,73.561 v3(23.638,73.561)
  other v1: 23.114,71.374 23.749,71.374 24.384,71.374 25.019,71.374 25.654,71.374 26.289,71.374 26.924,71.374 27.559,71.374 28.194,71.374 28.829,71.374 29.464,71.374 30.099,71.374 30.734,71.374 31.369,71.374 32.004,71.374 32.639,71.374 33.274,71.374 33.909,71.374 34.544,71.374 35.179,71.374 35.814,71.374 36.449,71.374 37.084,71.374 37.719,71.374 38.354,71.374 38.989,71.374 39.624,71.374 40.259,71.374 40.894,71.374 41.529,71.374 42.164,71.374 42.799,71.374 43.434,71.374 44.069,71.374 44.704,71.374 45.339,71.374 45.974,71.374 45.974,72.009 21.209,72.644 25.654,72.644 44.069,72.644 45.974,72.644 21.209,73.279 40.894,73.279 45.974,73.279 21.209,73.914 40.894,73.914 45.974,73.914 21.209,74.549 25.654,74.549 44.069,74.549 45.974,74.549 21.209,75.184 45.974,75.184 21.209,75.819 21.844,75.819 22.479,75.819 23.114,75.819 23.749,75.819 24.384,75.819 25.019,75.819 25.654,75.819 26.289,75.819 26.924,75.819 27.559,75.819 28.194,75.819 28.829,75.819 29.464,75.819 30.099,75.819 30.734,75.819 31.369,75.819 32.004,75.819 32.639,75.819 33.274,75.819 33.909,75.819 34.544,75.819 35.179,75.819 35.814,75.819 36.449,75.819 37.084,75.819 37.719,75.819 38.354,75.819 38.989,75.819 39.624,75.819 40.259,75.819 40.894,75.819 41.529,75.819 42.164,75.819 42.799,75.819 43.434,75.819 44.069,75.819 44.704,75.819 45.339,75.819 45.974,75.819
Shunt_H_PowerModuleCell_M2: Q1_PowerModuleCell_M2.4 Q1_PowerModuleCell_M2.5 Q1_PowerModuleCell_M2.6 Q1_PowerModuleCell_M2.7 Q1_PowerModuleCell_M2.8 Q1_PowerModuleCell_M2.9 Q1_PowerModuleCell_M2.10 Q1_PowerModuleCell_M2.11 R22_PowerModuleCell_M2.1 U1_PowerModuleCell_M2.10
Shunt_H_PowerModuleCell_M3: Q1_PowerModuleCell_M3.4 Q1_PowerModuleCell_M3.5 Q1_PowerModuleCell_M3.6 Q1_PowerModuleCell_M3.7 Q1_PowerModuleCell_M3.8 Q1_PowerModuleCell_M3.9 Q1_PowerModuleCell_M3.10 Q1_PowerModuleCell_M3.11 R22_PowerModuleCell_M3.1 U1_PowerModuleCell_M3.10
Shunt_H_PowerModuleCell_M4: Q1_PowerModuleCell_M4.4 Q1_PowerModuleCell_M4.5 Q1_PowerModuleCell_M4.6 Q1_PowerModuleCell_M4.7 Q1_PowerModuleCell_M4.8 Q1_PowerModuleCell_M4.9 Q1_PowerModuleCell_M4.10 Q1_PowerModuleCell_M4.11 R22_PowerModuleCell_M4.1 U1_PowerModuleCell_M4.10
Source: IC3.B1 Q3.1 Q3.4 | length 3.9
  Top Layer 1 w0.254: Q3.1@140.423,88.574 140.423,88.988 141.035,89.6 ; Q3.4@141.423,90.244 141.4,90.221 141.4,89.965 141.035,89.6 ; IC3.B1@142.856,89.6 141.035,89.6
SPI2-MISO: IC1.27 J2.3
SPI2-MOSI: IC1.28 J2.4
SPI2-SCK: IC1.26 J2.2
SWCLK: IC1.37 J12.2
SWDIO: IC1.36 J12.4
SYS_PWR_DET: IC1.45 J29.1 R1.1 R2.2 | length 51.5
  Top Layer 1 w0.254: 143.383,66.248 143.383,84.709 141.351,86.741 139.7,86.741 138.303,88.138 138.303,98.552 139.065,99.314 144.907,99.314 147.208,97.013 J29.1@147.208,94.09 ; J29.1@147.193,94 147.367,94.174 148.971,94.174 ; R1.1@148.971,93.591 148.971,94.174 ; R2.2@148.971,94.758 148.971,94.174
USART2_RX: IC1.38 IC2.14 J13.2 R11.1
USART2_TX: IC1.41 IC2.12 J13.4 R10.1
USB_DM: IC1.33 J6.2
USB_DP: IC1.34 J6.4
VBAT: IC1.1 P1.7 P2.7
Vcc: J4.3 J5.3 J6.3 J12.3 J13.3 Y2.1 Y2.4
Vcc_1: C29.2 C30.2 C31.2 C32.2 IC2.1 IC2.7 IC2.10 IC2.16 J3.3 J7.3 P1.9 P2.9 R33_Opto2.1
Vcc_2: C3.1 C8.2 C9.2 C10.2 C11.2 C12.2 C13.2 C17_PowerModuleCell_M1.1 C17_PowerModuleCell_M2.1 C17_PowerModuleCell_M3.1 C17_PowerModuleCell_M4.1 C27.2 C28.2 IC1.23 IC1.35 IC1.48 J26.1 L2.2 R3.2 R4.2 R5.2 R12.2 R13.2 R14.1 R15.2 R16.2 R18_PowerModuleCell_M1.2 R18_PowerModuleCell_M2.2 R18_PowerModuleCell_M3.2 R18_PowerModuleCell_M4.2 R20_PowerModuleCell_M1.2 R20_PowerModuleCell_M2.2 R20_PowerModuleCell_M3.2 R20_PowerModuleCell_M4.2 R33_Opto1.1 U2_PowerModuleCell_M1.B1 U2_PowerModuleCell_M2.B1 U2_PowerModuleCell_M2.C1 U2_PowerModuleCell_M3.B1 U2_PowerModuleCell_M4.B1 U3.3 | length 103.7
  Top Layer 1 w0.254: R20_PowerModuleCell_M1.2@25.654,54.938 26.289,54.938 ; R18_PowerModuleCell_M1.2@25.695,53.975 26.289,53.975 ; 29.464,51.816 26.479,51.816 cw(c26.479,52.006) 26.289,52.006 26.289,53.975 ; 32.766,69.342 29.337,69.342 ccw(c29.337,68.199) 28.194,68.199 28.194,56.896 26.289,54.991 26.289,54.938 ; C8.2@170.949,66.618 170.949,66.603 172.366,66.603 cw(c172.366,66.287) 172.682,66.287 172.682,62.884 ; 175.082,60.484 ccw(c175.436,60.484) 175.436,60.13 C11.2@177.583,60.13 ; 177.038,81.2 R3.2@177.038,82.183 ; R14.1@181.737,69.207 181.737,70.231 ; 26.289,53.975 26.289,54.938
  Top Layer 1 w0.5: C9.2@169.391,66.618 C8.2@170.949,66.618 ; C11.2@177.583,60.13 C10.2@179.675,60.13
  Top Layer 1 w1: C9.2@169.391,66.603 169.391,66.618 169.391,69.668 cw(c169.954,69.668) 169.954,70.231 181.737,70.231 182.572,70.231 ccw(c182.571,70.794) 183.134,70.793 ; U3.3@171.26,81.2 C27.2@175.031,81.2 177.038,81.2 181.408,81.2 ; L2.2@179.527,74.93 183.134,74.93 ; C10.2@179.675,60.13 182.515,60.13 cw(c182.513,59.567) 182.518,60.13 182.565,60.13 ccw(c182.571,60.693) 183.134,60.691 183.134,70.793 ; 181.408,81.2 ccw(c182.846,81.153) 182.569,79.74 cw(c182.458,79.188) 182.654,79.716 182.655,79.716 ccw(c183.134,80.995) 183.134,79.629 ; 181.408,81.2 182.571,81.2 cw(c182.571,80.637) 183.134,80.637 183.134,79.629 ; 183.134,70.793 183.134,74.93 ; 183.134,74.93 183.134,79.629
  Bottom Layer 1 w0.254: 26.446,48.23 v1(26.446,51.982)
Vin: C1.1 C23.1 C24.2 C25.2 C26.2 C44.2 IC3.A2 J24.1 L1.2 PS1.7 Q3.3 R1.2 R6.2 U3.1 | length 65.2
  Top Layer 1 w0.254: IC3.A2@143.256,90 144.135,90.879 C44.2@145.012,90.879 ; R1.2@148.971,92.591 151.147,92.591 151.202,92.646 ; 152.469,92.188 ccw(c152.654,92.188) 152.654,92.003 ; 154.178,92.003 ccw(c154.178,92.075) 154.25,92.075 R6.2@154.25,93.047 ; 156.481,89.629 157.616,89.629 157.71,89.535 ; C23.1@157.71,92.003 cw(c157.964,92.003) C23.1@157.72,92.075 ; U3.1@166.624,80.155 166.658,81.2 U3.1@166.66,81.278 U3.1@166.66,81.2
  Top Layer 1 w1: C44.2@145.012,90.879 151.077,90.879 151.202,91.004 ; L1.2@151.202,78.232 151.202,91.004 ; J24.1@151.202,93.98 151.202,92.646 151.202,92.003 ; C23.1@157.72,92.075 PS1.7@164.185,92.075 ; U3.1@166.66,81.2 166.658,81.2 C26.2@162.814,81.2 158.273,81.2 cw(c158.273,81.763) 157.71,81.763 157.71,89.535 C23.1@157.71,92.003 154.178,92.003 152.654,92.003 151.202,92.003 ; 151.202,91.004 151.202,92.003
  Bottom Layer 1 w0.254: v1(141.423,88.574) 142.849,90 143.256,90
Vout: C45.2 D11.1 IC3.C1 J1.1 Q3.6 | length 23.6
  Top Layer 1 w0.254: C45.2@142.856,87.468 IC3.C1@142.856,89.2
  Top Layer 1 w0.635: Q3.6@140.381,90.244 139.012,90.244 138.938,90.17 ; C45.2@142.934,87.39 139.94,87.39 138.938,88.392 138.938,90.17 ; J1.1@144.018,95.835 142.698,97.155 140.081,97.155 139.065,96.139 139.065,94.742 140.955,92.852 D11.1@140.955,91.569 139.702,91.569 138.938,90.805 138.938,90.17
pads on no net: J1.MH1 J1.MH2 J8. J9. J10. J11. J18. J19. PS1.5 U5.1 Y2.3
copper on no net:
  other v1: 39.814,66.768 40.83,66.768 41.846,66.768 42.862,66.768 43.878,66.768 44.894,66.768 45.91,66.768 46.926,66.768 48.069,66.768 48.069,67.657 39.814,67.784 38.328,69.255 15.494,69.723 16.637,69.723 17.907,69.723 16.002,70.231 16.002,70.231 17.272,70.231 18.542,70.231 15.494,70.866 16.002,71.501 15.494,72.136 16.002,72.771 16.002,72.771 15.494,73.406 15.494,73.406 16.002,74.041 15.494,74.676 16.002,75.311 15.494,75.946 15.494,77.089 39.814,77.589 48.069,77.716 39.814,78.605 40.83,78.605 41.846,78.605 42.862,78.605 43.878,78.605 44.894,78.605 45.91,78.605 46.926,78.605 48.069,78.605

## Polygon pours and split planes (outlines as drawn)
GND_2 on Top Layer 1 "NONET_L01_P002" (solid, remove dead copper, shelved, pour order 2): 200.025,34.835 192.73,34.835 192.73,72.875 192.626,72.771 186.69,72.771 186.69,90.085 186.605,90.17 172.847,90.17 172.847,99.949 125.095,99.949 125.095,80.518 100.33,80.518 96.248,76.472 74.803,76.454 74.803,68.707 96.248,68.707 96.248,31.403 74.803,31.403 74.803,24.892 76.073,23.622 85.852,23.622 85.852,20.066 39.497,20.066 39.497,23.622 49.276,23.622 50.292,24.638 50.292,31.403 28.702,31.403 28.702,68.707 50.165,68.707 50.165,76.454 28.702,76.454 24.517,80.639 0.025,80.649 0.13,0 200.025,0
GND_1 on Top Layer 1 "NONET_L01_P006" (solid, shelved, pour order 6): 199.88,34.86 192.754,34.86 192.73,34.835 192.73,72.875 186.69,72.875 186.69,90.043 186.563,90.17 172.847,90.17 172.847,99.949 172.857,99.959 199.991,99.959 199.991,34.971
Load on Top Layer 1 "NONET_L01_P000" (solid, remove dead copper, shelved, pour order 0): 77.885,23.622 77.885,31.403 85.852,31.403 85.886,31.369 96.266,31.369 96.266,68.707 77.874,68.707 77.874,76.454 96.266,76.454 100.33,80.518 125.023,80.518 125.095,80.59 125.095,99.949 0,99.949 0.025,99.924 0.025,80.649 12.47,80.649 12.475,80.644 24.512,80.644 28.702,76.454 46.736,76.454 46.736,68.707 39.497,68.707 28.575,68.707 28.575,31.369 39.463,31.369 39.497,31.403 47.094,31.403 47.094,23.622 39.497,23.622 39.497,20.066 85.852,20.066 85.852,23.622
GND_2 on Bottom Layer 1 "NONET_L02_P004" (solid, shelved, pour order 4): 199.88,34.86 200.025,35.005 200.025,99.949 125.857,99.949 125.857,80.518 100.33,80.518 98.552,78.756 98.552,20.066 26.289,20.066 26.289,78.867 24.517,80.639 0.025,80.649 0.13,0 199.997,0
Load on Bottom Layer 1 "NONET_L02_P003" (solid, remove dead copper, shelved, pour order 3): 27.686,68.707 27.559,68.58 27.559,31.369 28.541,31.369 28.575,31.403 47.117,31.403 47.117,23.622 39.497,23.622 39.497,20.066 85.852,20.066 85.852,23.622 77.851,23.622 77.851,31.403 85.852,31.403 85.886,31.369 97.282,31.369 97.282,68.707 77.978,68.707 77.978,76.454 96.266,76.454 100.33,80.518 112.395,80.518 125.095,80.518 125.095,99.822 0.127,99.822 0.025,99.924 0.025,80.649 12.47,80.649 12.475,80.644 24.512,80.644 28.702,76.454 46.736,76.454 46.736,68.707

## Other copper
Top Layer 1:
  region net Load: 47.498,76.581 40.005,76.581 40.005,77.978 47.498,77.978
  region net Shunt_H_PowerModuleCell_M1: 20.83,76.069 46.23,76.069 46.23,71.069 20.83,71.069
  region net Load: 39.952,68.792 47.445,68.792 47.445,67.395 39.952,67.395
Bottom Layer 1:
  region net Shunt_H_PowerModuleCell_M1: 22.098,70.993 22.098,71.409 23.673,72.984 23.933,72.984 24.257,73.308 24.257,73.787 23.876,74.168 23.368,74.168 22.987,73.787 22.987,73.588 21.252,71.853 21.252,71.12 20.701,71.12 20.701,76.2 46.098,76.2 46.355,75.943 46.355,71.194 46.154,70.993

## Silkscreen, mask and mechanical layers (free items; w line width, h text height)
Top Overlay:
  text "SPI" at 142.461,9.685 h0.84 r90
  text "USB" at 149.827,9.685 h0.84 r90
  text "ISO_UART" at 163.53,9.685 h0.84 r90
  text "I2C-1" at 177.767,9.685 h0.84 r90
  text "ST-Link" at 135.222,9.558 h0.84 r90
  text "UART" at 156.812,9.558 h0.84 r90
  text "ISO_I2C-1" at 170.515,9.558 h0.84 r90
  text "I2C-2" at 184.752,9.558 h0.84 r90
Mechanical 1:
  lines w0.102: 0,0 0,100 200,100 200,0 0,0
  lines w0.254: 155.194,69.977 ccw(c156.464,69.977) 156.464,68.707 165.608,68.707 ccw(c165.608,69.088) 165.989,69.088 ccw(c165.608,69.088) 165.608,69.469 157.226,69.469 cw(c157.226,70.739) 155.956,70.739 155.956,75.311 cw(c157.226,75.311) 157.226,76.581 165.608,76.581 ccw(c165.608,76.962) 165.989,76.962 ccw(c165.608,76.962) 165.608,77.343 156.464,77.343 ccw(c156.464,76.073) 155.194,76.073 155.194,69.977